# Altium PCB SkipEight.PcbDoc
Units mil, origin at the board's own origin, x right, y up, seen from the top; angles counter-clockwise.
Board outline 5075 x 795 mil, 2 copper layers (Top Layer, Bottom Layer); 31 components, 41 nets, 134 pads, 81 vias.
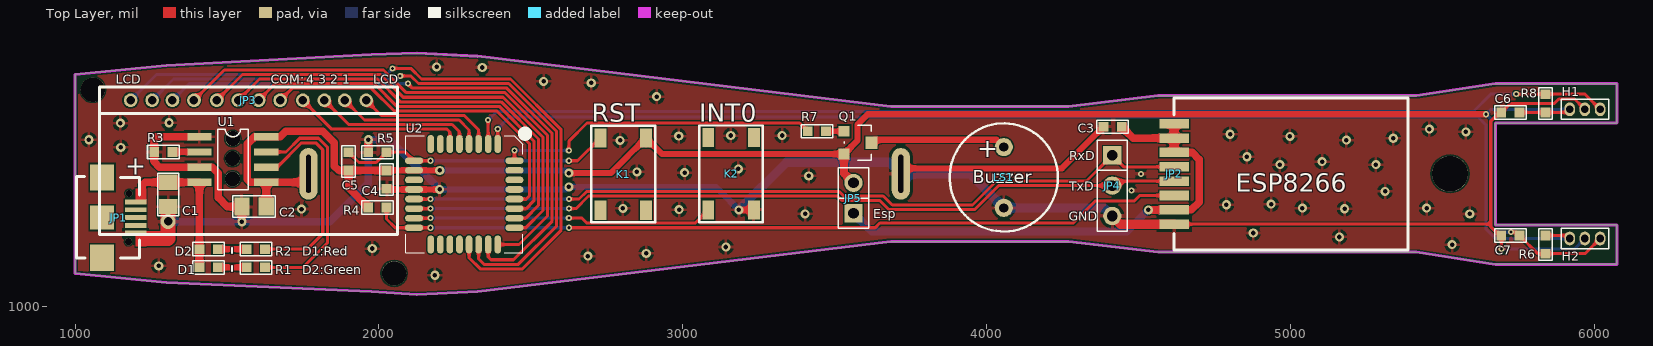
[diagram p0: Top Layer view]
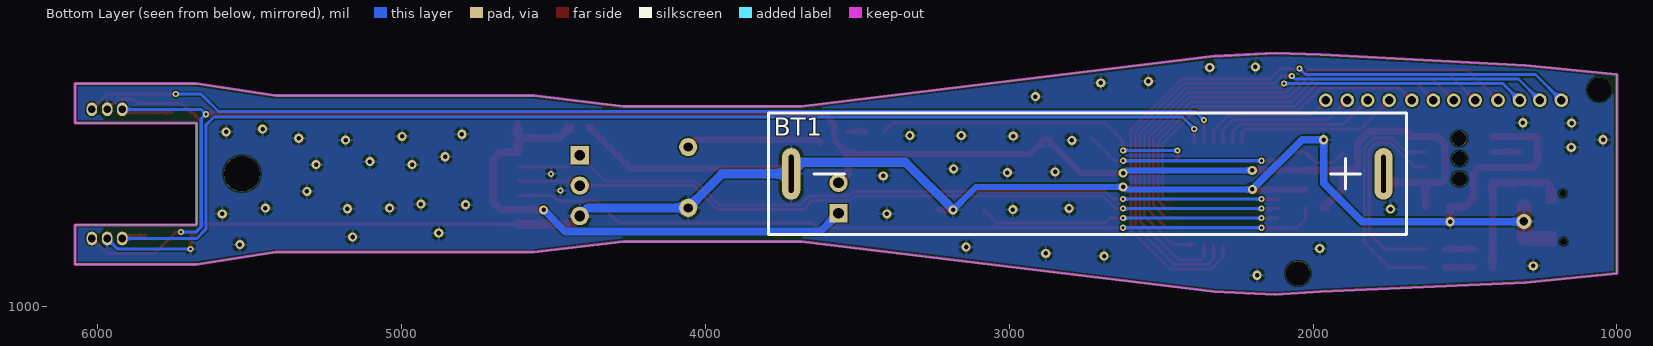
[diagram p1: Bottom Layer view, seen from below]

## Layer stack, top to bottom
Top Solder: solder mask 0.4, Solder Resist, Dk 3.5
Top Layer: signal copper 1.4
Dielectric 1: dielectric 12.6, FR-4, Dk 4.8
Bottom Layer: signal copper 1.4
Bottom Solder: solder mask 0.4, Solder Resist, Dk 3.5

## Board outline
1300,1080 1975,1050 2125,1040 2325,1050 3685,1215 4270,1215 4565,1180 5415,1180 5675,1140 6075,1140 6075,1270 5675,1270 5675,1605 6075,1605 6075,1735 5675,1735 5415,1695 4565,1695 4270,1660 3685,1660 2325,1825 2125,1835 1975,1830 1300,1795 1000,1765 1000,1110

## Design rules (kind name [scope] priority, off if disabled: settings)
Clearance [All] p1: gap=5
HoleSize [All] p1: absolutevalues=TRUE maxlimit=150 minlimit=1 maxpercent=80.000 minpercent=20.000
MinimumSolderMaskSliver [All] p1: minsoldermaskwidth=0
PolygonConnect [All] p1: connectstyle=Relief reliefconductorwidth=10 reliefentries=4 polygonreliefangle="90 Angle" airgapwidth=10
RoutingVias [All] p1: holewidth=15 width=30 viastyle="Through Hole" minholewidth=10 minwidth=20 maxholewidth=28 maxwidth=50
SilkToSilkClearance [All] p1: silktosilkclearance=0
SilkToSolderMaskClearance [IsPad] p1: minsilkscreentomaskgap=0 clearancetoexposedcopper=TRUE
SolderMaskExpansion [All] p1: expansion=4
Width [All] p1: maxlimit=50 minlimit=10 preferedwidth=20 minimp=50.000000 maximp=50.000000 favimp=50.000000
26 further rules are at their usual default settings.

## Classes and differential pairs
component class SkipEight: BT1 C1 C2 C3 C4 C5 D1 D2 JP1 JP2 JP3 JP4 JP5 K1 K2 LS1 Q1 R1 R2 R3 R4 R5 R6 R7 U1 U2

## Components (designator, comment, footprint, x,y, rotation, side; value= is the part's Value field where it differs from the comment)
BT1 "BATTERY_1" "AAA Battery" 1768,1438 r0 bottom
C1 "4.7uF" 0805 1306,1330 r90 top
C2 "4.7uF" 0805 1549,1330 r0 top
C3 "104" 0603 4385,1593 r0 top
C4 "104" 0603 2025,1389 r90 top
C5 "474" 0603 1900,1449 r90 top
C6 "20pF" 0603 5755,1640 r180 top
C7 "20pF" 0603 5695,1235 r0 top
D1 "Red" 0603 1409,1130 r0 top
D2 "Green" 0603 1409,1190 r0 top
H1 "A1344E" A3144 5920,1650 r0 top
H2 "A1344E" A3144 5920,1225 r0 top
JP1 "MricoUSB" MircoUSB 1197,1345 r180 top
JP2 "ESP8266" ESP8266-11 4618,1272 r0 top
JP3 "LCD" LCD1621 1958,1680 r180 top
JP4 "Uart" SIP3 4414,1499 r270 top
JP5 "Wire" SIP2 3562,1308 r90 top
K1 "Switch1" KEY-SMT 2879,1556 r270 top
K2 "Switch1" KEY-SMT 3084,1319 r90 top
LS1 "SPEAKER" Buzzer-Small 4057,1526 r270 top
Q1 "PNP" SOT-23 3531,1578 r270 top
R1 "330" 0603 1565,1130 r0 top
R2 "1K" 0603 1565,1190 r0 top
R3 "3.3K" 0603 1320,1510 r180 top
R4 "10K" 0603 2025,1327 r180 top
R5 "10K" 0603 2025,1509 r180 top
R6 "820" 0603 5840,1175 r90 top
R7 "330" 0603 3472,1578 r180 top
R8 "820" 0603 5840,1640 r90 top
U1 "CN3058" SO-8 1409,1560 r0 top
U2 "STC15L408AD_QFP32" LQFP32 2391,1536 r270 top

## Footprints (in the part's own frame and the unit in brackets; to place one, negate y for a bottom-side part, rotate by r counter-clockwise, add the part's x,y. Pads: shape width x height; smd on the part's side, far side on the other; paste and mask are expansions set on the pad)
0603 [mil]
  rect 32x32 smd: 1(0,0) 2(60,0)
  silkscreen extent -22,-22 82,22
0805 [mil]
  rect 50x60 smd: 1(0,0) 2(80,0)
  silkscreen extent -30,-35 110,35
A3144 [mil]
  oval 35x45 hole 25: 1(0,0) 2(50,0) 3(100,0)
  silkscreen extent -28,-33 128,33
"AAA Battery" [mil]
  oval 60x170 hole 16 slot 125 at 90 deg: 1(0,0) 2(1950,0)
  silkscreen extent -75,-200 2025,200
Buzzer-Small [mil]
  round 60 hole 30: 1(0,0) 2(200,0)
  silkscreen extent -78,-178 278,178
ESP8266-11 [mm]
  rect 2.5x0.8 smd: 1(0,0) 2(0,1.2) 3(0,2.4) 4(0,3.6) 5(0,4.8) 6(0,6) 7(0,7.2) 8(0,8.4)
  silkscreen extent 0,-2.16 19.56,10.54
KEY-SMT [mm]
  rect 1.6x1 smd: 1(0,0) 2(0,-3.81) 3(6.044,-3.81) 4(6.044,0)
  silkscreen extent -1.02,-4.57 7.06,0.76
LCD1621 [mil]
  round 45 hole 28: 1(0,0) 2(70.87,0) 3(137.8,0) 4(208.66,0) 5(283.46,0) 6(354.33,0) 7(421.26,0) 8(492.13,0) 9(566.93,0) 10(637.8,0) 11(704.72,0) 12(775.59,0)
  silkscreen extent -102,-43 878,43
LQFP32 [mm]
  oval 1.5x0.55 smd: 1(0,0) 2(0,-0.8) 3(0,-1.6) 4(0,-2.4) 5(0,-3.2) 6(0,-4) 7(0,-4.8) 8(0,-5.6) 17(8.4,-5.6) 18(8.4,-4.8) 19(8.4,-4) 20(8.4,-3.2) 21(8.4,-2.4) 22(8.4,-1.6) 23(8.4,-0.8) 24(8.4,0)
  oval 0.55x1.5 smd: 9(1.4,-7) 10(2.2,-7) 11(3,-7) 12(3.8,-7) 13(4.6,-7) 14(5.4,-7) 15(6.2,-7) 16(7,-7) 25(7,1.4) 26(6.2,1.4) 27(5.4,1.4) 28(4.6,1.4) 29(3.8,1.4) 30(3,1.4) 31(2.2,1.4) 32(1.4,1.4)
  silkscreen extent -0.7,-7.7 9.1,2.1
MircoUSB [mm]
  rect 1.8x0.4 smd: 1(-0.05,0) 2(-0.05,0.65) 3(-0.05,1.3) 4(-0.05,1.95) 5(-0.05,2.6)
  rect 2x2.2 smd: 6(2.75,4.65) 7(2.75,-2.05)
  rect 2x2 smd: 8(2.75,1.3)
  silkscreen extent -0.37,-2.12 4.88,4.67
SIP2 [mil]
  rect 60x60 hole 35: 1(0,0)
  round 60 hole 35: 2(100,0)
  silkscreen extent -50,-50 150,50
SIP3 [mil]
  rect 60x60 hole 35: 1(0,0)
  round 60 hole 35: 2(100,0) 3(200,0)
  silkscreen extent -50,-50 250,50
SO-8 [mil]
  rect 80x24 smd: 1(0,0) 2(0,-50) 3(0,-100) 4(0,-150) 5(220,-150) 6(220,-100) 7(220,-50) 8(220,0)
  silkscreen extent 60,-175 160,25
SOT-23 [mil]
  rect 36x36 smd: 1(0,0) 2(75,0)
  rect 40x40 smd: 3(38,90)
  silkscreen extent -20,0 95,90

## Part data
BT1: "Battery"
C1 C2 C3 C4 C6 C7: library part CAP1
C5: library part Cap1, "电容"
D1 D2: library part LED, "LED灯"
H1 H2 JP4: library part "HEADER 3"
JP1: library part "HEADER 5"
JP2: library part "HEADER 8"
JP3: library part "HEADER 12"
JP5: library part "HEADER 2"
K1 K2: "按键/单刀单掷开关"
Q1: "PNP Transistor"
R1 R2 R3 R4 R5 R7: library part Res2, "电阻"
R6 R8: library part RES2, "Resistor"
U2: library part STC15F408AD_QFP32

## Free pads (board coordinates)
  round 80 hole 80: 0(1058,1715) 0(2050,1110)
  round 50 hole 50: 0(1518,1421) 0(1518,1488) 0(1519,1554)
  round 118.11 hole 118.11: 0(5526,1438)

## Via types
v1: diameter 30, hole 15, Top Layer to Bottom Layer, 55 vias
v2: diameter 20, hole 10, Top Layer to Bottom Layer, 23 vias
v3: diameter 23.62, hole 23.62, Top Layer to Bottom Layer, 2 vias
v4: diameter 50, hole 28, Top Layer to Bottom Layer, 1 vias

## Nets (pads, with @x,y where several pads share a name; then routed paths per layer and width w, separated by ;. In a path a pad name is that pad's centre, name@x,y a point inside that pad or via, vN(x,y) a via of type N, cw(c..) or ccw(c..) an arc to the next point about the centre after c; other vN are vias at no path point)
3.3V: BT1.1 C2.2 C4.2 C5.1 C6.1 C7.2 H1.1 H2.3 JP5.2 K1.1 Q1.2 R4.2 R6.1 R8.1 U1.5 U1.8 U2.10 | length 6283.1
  Top Layer w10: v2(5727,1246) 5744,1246 C7.2 5815,1175 R6.1 5970,1175 H2.3 ; C6.1 R8.1 5910,1640 H1.1
  Top Layer w20: C4.2@2025.39,1449.39 U2.10 v1(2200,1449.39) ; v1(2625,1440) 2763,1440 K1.1 2932,1503 Q1.2 3575,1547 3575,1600 3609,1634 v2(5645,1634)
  Top Layer w25: C2.2 U1.5 ; BT1.1 1740,1410 U1.5 ; R4.2 1900,1392 C5.1 ; C4.2@2025.39,1449.39 C4.2 C5.1 ; Q1.2 3531,1439 JP5.2 ; U1.5 1577,1410 1567,1420 1567,1537 1590,1560 U1.8 1675,1560 1693,1578 1815,1578 1853,1540 1853,1463 1867,1449 C5.1
  Bottom Layer w10: v2(5727,1246) 5677.79,1246 5660,1263.79 5660,1619 v2(5645,1634) 5661,1650 H1.1 H1.1@5910,1640
  Bottom Layer w20: v1@2200.61,1450 v1(2200,1449.39) 2615.61,1449.39 v1(2625,1440)
ENWIFI: C3.2 JP2.2 JP2.6 JP2.7 JP2.8 JP5.1 | length 1718.1
  Top Layer w25: C3.2 4482.54,1555.46 JP2.7 ; v1(4533,1319.24) JP2.2 4674.24,1319.24 4700,1345 4700,1485 4676.78,1508.22 JP2.6 JP2.7 ; JP2.8@4617.71,1603 JP2.8 JP2.7
  Bottom Layer w25: JP5.1 3622,1248 4461.76,1248 v1(4533,1319.24)
GND: BT1.2 C1.1 C2.1 C3.1 C4.1 C6.2 C7.1 H1.2 H2.2 JP1.5 JP2.1 JP4.3 K2.2 LS1.2 R3.2 R5.2 U1.1 U1.3 U2.12 | length 7742.4
  Top Layer w10: JP2.1 5660,1272 ; v2(5695,1190) C7.1 5688.79,1235 5660,1263.79 5660,1272 ; H1.2 5936,1684 5884,1684 5870,1670 5725,1670 C6.2 5688.79,1640 5660,1611.21 5660,1272
  Top Layer w20: C4.1 2027.61,1386.39 U2.12 v1(2199.39,1386.39) ; v1(3185,1319) K2.2 ; BT1.2 3736,1456 4248,1456 C3.1
  Top Layer w25: U1.1 1266,1560 1260,1554 R3.2 1260,1477 1277,1460 U1.3 1451,1460 1471,1440 1471,1360 1501,1330 C2.1 v1(1549,1280) ; R5.2 v1(1965,1550)
  Top Layer w30: JP4.3 4441,1272 JP2.1
  Top Layer w50: 1226,1225 1306,1225 v4(1306,1281) C1.1
  Bottom Layer w10: v2(5695,1190) 5935,1190 H2.2
  Bottom Layer w20: v1(2199.39,1386.39) 2616.39,1386.39 v1(2625,1395) 3109,1395 v1(3185,1319)
  Bottom Layer w25: v4(1306,1281) 1307,1280 v1(1549,1280) 1838,1280 1965,1407 v1(1965,1550) 2035.79,1550 v1(2199.39,1386.39)
  Bottom Layer w30: v1(3185,1319) 3342,1476 3680,1476 BT1.2 3945,1438 LS1.2 4387,1326 JP4.3
  other v1: 2184,1104 1275,1135 2688,1167 2880,1176 1978,1192 3142,1197 5533,1205 5162,1230 4878,1243 3403,1306 5591,1306 2988,1320 1745,1322 5179,1323 2803,1324 5040,1325 5449,1325 4790,1336 4937,1338 5312,1380 3415,1431 3006,1442 2849,1444 3183,1454 4966,1468 5282,1468 5105,1478 4857,1494 1150,1525 2794,1548 5185,1549 1045,1550 5339,1555 4999,1561 2987,1562 3158,1564 3327,1564 4802,1568 5578,1576 5458,1585 1149,1605 1309,1606 2914,1692 2699,1737 2542,1742 2340,1788 2190,1790
  other v2: 4477,1383 4508,1438
NetD1_2: D1.2 R1.1 | length 96
  Top Layer w20: D1.2 R1.1
NetD2_2: D2.2 R2.1 | length 96
  Top Layer w20: D2.2 R2.1
NetLS1_1: LS1.1 Q1.3 | length 450.1
  Top Layer w20: Q1.3 3631,1550 4033,1550 LS1.1
NetQ1_1: Q1.1 R7.1 | length 59
  Top Layer w15: R7.1 Q1.1
NetR1_2: R1.2 U1.7 | length 785.8
  Top Layer w10: R1.2 1750,1130 1830,1210 1830,1526 1801,1555 1738.79,1555 1693.79,1510 U1.7
NetR2_2: R2.2 U1.6 | length 715.8
  Top Layer w10: R2.2 1764,1190 1815,1241 1815,1517 1792,1540 1745,1540 1665,1460 U1.6
NetR3_1: R3.1 U1.2 | length 89
  Top Layer w20: R3.1 U1.2
P00: U2.29
P01: U2.30
P02: U2.31
P03: R7.2 U2.32 | length 1066
  Top Layer w10: U2.32 v2(2446.12,1514.88) ; v2(2624.88,1514.88) 2624.88,1544.88 2685,1605 3385,1605 R7.2
  Bottom Layer w10: v2(2446.12,1514.88) v2(2624.88,1514.88)
P10: H2.1 R6.2 U2.1 | length 4045.9
  Top Layer w10: U2.1 v2(2391,1586) ; R6.2 5910,1235 H2.1
  Bottom Layer w10: v2(2391,1586) 2430,1625 5618,1625 5645,1598 5645,1255 5675,1225 H2.1
P11: H1.3 R8.2 U2.2 | length 3795.4
  Top Layer w10: U2.2 v2(2359.5,1615) ; v2(5744,1700) R8.2 5970,1700 H1.3
  Bottom Layer w10: v2(2359.5,1615) 2387.5,1643 5603,1643 5660,1700 v2(5744,1700)
P12: JP3.1 U2.3 | length 457.2
  Top Layer w10: JP3.1 2008,1630 2281,1630 2328.01,1582.99 U2.3
P13: JP3.2 U2.4 | length 496.3
  Top Layer w10: JP3.2 1952.13,1615 2264,1615 2296.51,1582.49 U2.4
P14: JP3.3 U2.5 | length 527.9
  Top Layer w10: JP3.3 1900.2,1600 2241,1600 2265.02,1575.98 U2.5
P15: JP3.4 U2.6 | length 567
  Top Layer w10: JP3.4 1844.34,1585 2224,1585 2233.52,1575.48 U2.6
P16: U2.7
P17: U2.8
P20: JP3.12 U2.21 | length 2290.6
  Top Layer w10: v2(2045,1785) 2105,1785 2140,1750 2433.28,1750 2600,1583.28 2600,1252.57 2472.43,1125 2333,1125 2296.51,1161.49 U2.21
  Bottom Layer w10: JP3.12 1267.41,1765 2025,1765 v2(2045,1785)
P21: JP3.11 U2.22 | length 2115.6
  Top Layer w10: v2(2070,1760) 2105,1760 2130,1735 2427.07,1735 2585,1577.07 2585,1266 2459,1140 2346,1140 2328.01,1157.99 U2.22
  Bottom Layer w10: JP3.11 1323.28,1750 2060,1750 v2(2070,1760)
P22: JP3.10 U2.23 | length 1937.3
  Top Layer w10: v2(2095,1735) 2110,1720 2420.85,1720 2570,1570.85 2570,1282 2443,1155 2369,1155 2359.5,1164.5 U2.23
  Bottom Layer w10: JP3.10 1375.2,1735 v2(2095,1735)
P23: JP3.9 U2.24 | length 1763
  Top Layer w10: JP3.9 1491.07,1780 2015,1780 2090,1705 2414.64,1705 2555,1564.64 2555,1299 2461.29,1205.29 U2.24
P24: JP3.8 U2.25 | length 1553.6
  Top Layer w10: JP3.8 1550.87,1765 2005,1765 2080,1690 2408.43,1690 2540,1558.43 2540,1317 2483.41,1260.41 U2.25
P25: JP3.7 U2.26 | length 1413.7
  Top Layer w10: JP3.7 1606.74,1750 1995,1750 2070,1675 2402.21,1675 2525,1552.21 2525,1334 2482.91,1291.91 U2.26
P26: JP3.6 U2.27 | length 1278.9
  Top Layer w10: JP3.6 1658.67,1735 1984,1735 2059,1660 2396,1660 2510,1546 2510,1349 2484.4,1323.4 U2.27
P27: JP3.5 U2.28 | length 1138.5
  Top Layer w10: JP3.5 1714.54,1720 1975,1720 2050,1645 2388,1645 2495,1538 2495,1365 2484.9,1354.9 U2.28
P30: JP2.5 JP4.1 U2.13 | length 2615.3
  Top Layer w10: U2.13 v2(2169.9,1354.9) ; v2(2625,1354.9) 2658.68,1354.9 2683.79,1380 3515,1380 3530,1365 3660,1365 3690,1335 3954,1335 4033,1414 4329,1414 JP4.1 4452.02,1460.98 JP2.5
  Bottom Layer w10: v2(2169.9,1354.9) v2(2625,1354.9)
P31: JP2.4 JP4.2 U2.14 | length 2577.3
  Top Layer w10: U2.14 v2(2170,1323.4) ; v2(2625,1323.4) 2648.4,1323.4 2690,1365 3508.79,1365 3523.79,1350 3649,1350 3679,1320 3960.21,1320 4039.21,1399 JP4.2 4428.73,1413.73 JP2.4
  Bottom Layer w10: v2(2170,1323.4) v2(2625,1323.4)
P32: K2.1 U2.15 | length 993.5
  Top Layer w10: U2.15 v2(2170,1291.91) ; v2(2624.91,1291.91) 2668.09,1291.91 2684.59,1275.41 3040.41,1275.41 K2.1
  Bottom Layer w10: v2(2170,1291.91) v2(2624.91,1291.91)
P33: JP2.3 R4.1 U2.16 | length 2686.8
  Top Layer w10: R4.1 2025,1289 2053.59,1260.41 U2.16 v2(2170,1260.41) ; v2(2625,1260.41) 3633.41,1260.41 3649,1276 4286,1276 4359,1349 4487,1349 4504.49,1366.49 JP2.3
  Bottom Layer w10: v2(2170,1260.41) v2(2625,1260.41)
P34: U2.17
P35: U2.18
P36: U2.19
P37: U2.20
P55: U2.11
RST: C5.2 K1.2 R5.1 U2.9 | length 899.9
  Top Layer w10: C5.2 1934,1475 1991,1475 R5.1 2087.29,1509 U2.9 v2(2169.88,1480.88) ; v2(2624.88,1480.88) 2653.88,1480.88 K1.2
  Bottom Layer w10: v2(2169.88,1480.88) v2(2624.88,1480.88)
VCC: C1.2 D1.1 D2.1 JP1.1 U1.4 | length 520.1
  Top Layer w25: 1220,1353 1220,1400 1230,1410 C1.2 U1.4 D2.1 D1.1
pads on no net: JP1.2 JP1.3 JP1.4 JP1.6 JP1.7 JP1.8 K1.3 K1.4 K2.3 K2.4
copper on no net:
  other v3: 1175.35,1214.29 1177.32,1373.35

## Polygon pours and split planes (outlines as drawn)
GND on Bottom Layer "GND_L02_P018" (solid, remove dead copper, pour order 18): 1000,1835 1000,1040 6075,1040 6075,1835 1000,1835
GND on Top Layer "GND_L01_P020" (solid, remove dead copper, pour order 20): 1000,1835 1000,1040 6075,1040 6075,1835 1000,1835

## Keep-outs
Keep-Out Layer:
  the board outline again, w10

## Other copper
Top Layer:
  rectangle net GND: 1199,1198 1234,1250
  rectangle net VCC: 1199,1338 1234,1390

## Silkscreen, mask and mechanical layers (free items; w line width, h text height)
Top Overlay:
  circle w30: c2481,1570 r8.25
  lines w10: 1080,1640 1080,1238.36 1080.36,1238 2059.59,1238 2060.36,1238.77 2060.36,1640
  text "LCD" at 1133,1735 h30
  text "COM:" at 1644,1734 h30
  text "4 3 2 1" at 1760,1734 h30
  text "LCD" at 1982,1734 h30
  text "RST" at 2700,1610 h60
  text "INT0" at 3055,1610 h60
  text "+" at 3970,1492 h60
  text "RxD" at 4272,1483 h30
  text "+" at 1165,1435 h60
  text "Buzzer" at 3954,1407 h42
  text "TxD" at 4272,1383 h30
  text "ESP8266" at 4820,1379 h60
  text "Esp" at 3627,1292 h30
  text "GND" at 4271,1283 h30
  text "-" at 1540,1170 h60 r90
  text "D1:Red" at 1748,1168 h30
  text "-" at 1540,1110 h60 r90
  text "D2:Green" at 1748,1108 h30